# EAGLE board ble112_shield (EAGLE 7.2.0)
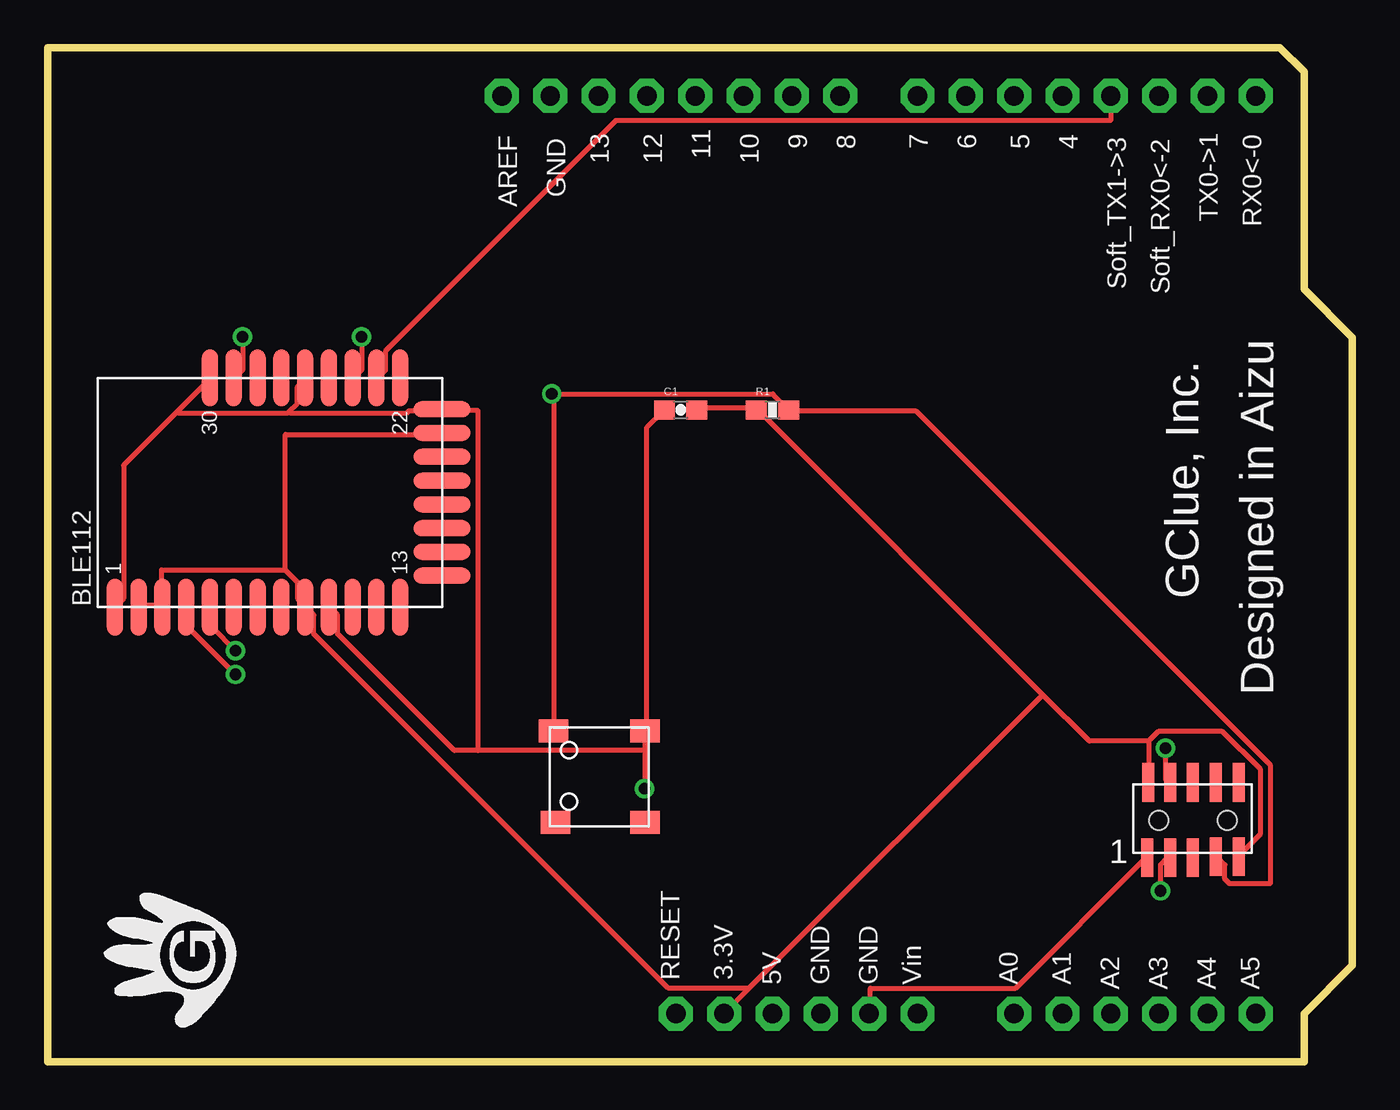
[diagram p0: board, top side]
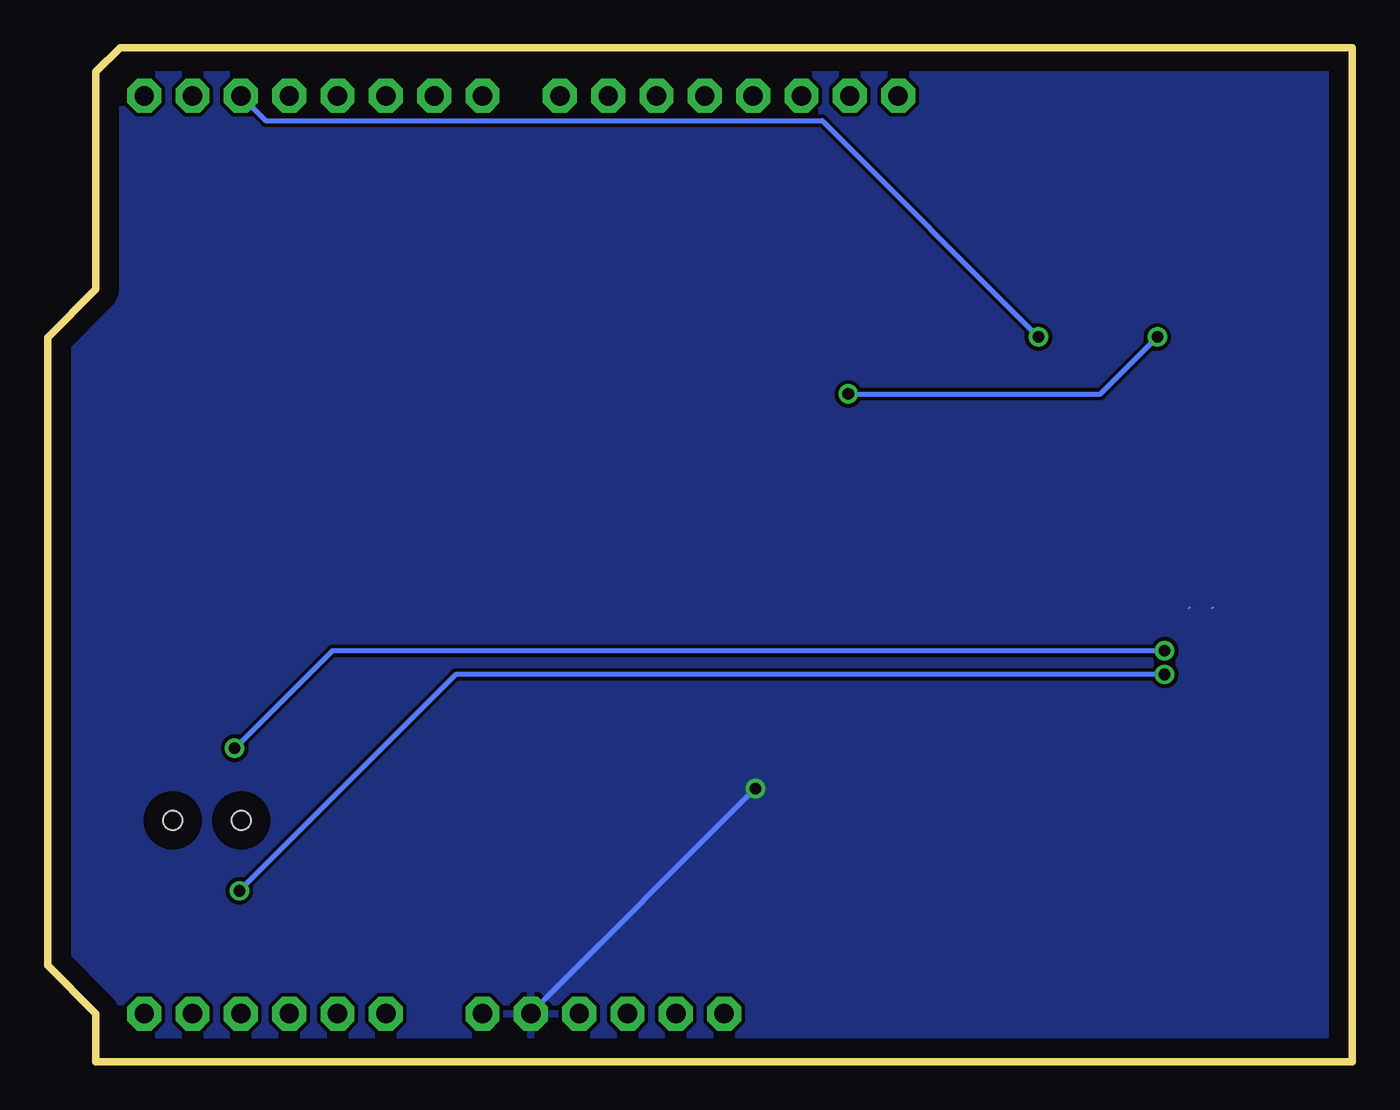
[diagram p1: board, bottom side, seen from below]

Size 68.58 x 53.34 mm. Coordinates in mm from the lower left corner, seen from the top.
Outline: 0,0 66.04,0 66.04,2.54 68.58,5.08 68.58,38.1 66.04,40.64 66.04,52.07 64.77,53.34 0,53.34 0,0
Copper layers (1*16): Top 0.035mm / dielectric 1.5mm / Bottom 0.035mm
Design rules "default": minimum track width 10mil, minimum drill 24mil, track to track 8mil, track to pad 8mil, pad to pad 8mil, via to via 8mil, smd to smd 8mil, copper to edge 40mil, drill to drill 8mil, minimum pad ring 10mil, minimum via ring 8mil, stop-mask expansion 4mil, vias tented up to drill 0mil, thermal gap 10mil

## Footprints (pad centres in the part's own frame; a part is rotated, then mirrored left to right if it is on the bottom)
1X06-CLEANBIG = drill 1.016 pad 1.778 octagon: 1 -6.35,0; 2 -3.81,0; 3 -1.27,0; 4 1.27,0; 5 3.81,0; 6 6.35,0
1X08-CLEANBIG = drill 1.016 pad 1.778 octagon: 1 -8.89,0; 2 -6.35,0; 3 -3.81,0; 4 -1.27,0; 5 1.27,0; 6 3.81,0; 7 6.35,0; 8 8.89,0
SF-BLUEGIGA_BLE112-A = smd 3 x 0.85: AVDD1 -6.05,6.9; AVDD2 -6.05,5.65; GND1 -6.05,8.15; GND2 -6.05,-3.1; GND4 6,3.15; P0_0 6,0.65; P0_1 6,-0.6; P0_2 6,-1.85; P0_3 6,-3.1; P0_4 6,-4.35; P0_5 6,-5.6; P0_6 6,-6.85; P1_5 -6.05,-6.85; P1_6 -6.05,-0.6; P1_7 -6.05,0.65; P2_0 -6.05,1.9; P2_1 -6.05,3.15; P2_2 -6.05,4.4; RESET 6,1.9; USB+ -6.05,-4.35; USB- -6.05,-5.6; VDD_USB -6.05,-1.85 | smd 0.85 x 3: DVDD 3.1,-9.05; GND3 4.35,-9.05; P0_7 1.85,-9.05; P1_0 0.6,-9.05; P1_1 -0.65,-9.05; P1_2 -1.9,-9.05; P1_3 -3.15,-9.05; P1_4 -4.4,-9.05
0603-CAP = smd 1.1 x 1: 1 -0.85,0; 2 0.85,0
0603-RES = smd 1.1 x 1: 1 -0.85,0; 2 0.85,0
PIN-HEADER-SMT(1.27MM)2X5 = smd 0.635 x 2.032: 1 -2.4,-1.95; 2 -2.35,2; 3 -1.2,-1.95; 4 -1.2,2; 5 0,-1.95; 6 0,2; 7 1.2,-1.9; 8 1.2,2; 9 2.4,-1.9; 10 2.4,2 | hole 1: 1.8,0; -1.8,0
SWICTH-LS6J2M-T = smd 1.55 x 1.2: 1 -2.4,2.4; 2 -2.3,-2.4; 3 2.4,2.4; 4 2.4,-2.4

## Placement (x,y rotation side)
1  [1X06-CLEANBIG]  57.15,2.54 0 top
2  [1X06-CLEANBIG]  39.37,2.54 0 top
3  [1X08-CLEANBIG]  54.61,50.8 180 top
4  [1X08-CLEANBIG]  32.77,50.8 180 top
BLE112  [SF-BLUEGIGA_BLE112-A]  11.68,29.97 90 top
C1  0.1μ  [0603-CAP]  33.27,34.29 0 top
R1  4.7K  [0603-RES]  38.1,34.29 0 top
U$1  PIN-HEADER-SMT(1.27MM)2X5  [PIN-HEADER-SMT(1.27MM)2X5]  60.2,12.7 0 top
U$4  SWITCH-LS6J2M-T  [SWICTH-LS6J2M-T]  29,15 0 top

## Library data of the parts
1-4 = adafruit
BLE112 = ble112
C1 R1 = SparkFun
U$1 U$4 = gclue

## Nets
3.3V: 2.2 BLE112.AVDD1 BLE112.AVDD2 BLE112.DVDD BLE112.VDD_USB C1.2 R1.1 U$1.2 U$1.9
D2: 3.3 BLE112.P0_4
D3: 3.4 BLE112.P0_5
DC: BLE112.P2_2 U$1.3
DD: BLE112.P2_1 U$1.4
GND: 2.5 BLE112.GND1 BLE112.GND2 BLE112.GND3 BLE112.GND4 BLE112.P0_2 C1.1 U$1.1 U$4.3
P0_0: BLE112.P0_0
P0_1: BLE112.P0_1
P0_3: BLE112.P0_3
P0_6: BLE112.P0_6
P0_7: BLE112.P0_7
P1_0: BLE112.P1_0
P1_1: BLE112.P1_1
P1_2: BLE112.P1_2
P1_3: BLE112.P1_3
P1_4: BLE112.P1_4
P1_5: BLE112.P1_5
P1_6: BLE112.P1_6
P1_7: BLE112.P1_7
P2_0: BLE112.P2_0
RESET: BLE112.RESET R1.2 U$1.7 U$4.1
USB+: BLE112.USB+
USB-: BLE112.USB-

## Tracks (layer width: path | path; a pad name or v marks a point on that pad's centre or on a via)
3.3V
  Top 0.254: BLE112.AVDD1 4.88,24 6,24 BLE112.AVDD2 6,24.12 6,25.88 12.5,25.88 | 12.5,25.88 13.12,25.25 13.12,24.38 13.5,24 BLE112.VDD_USB 13.62,23.88 14,23.5 14,22.5 32.62,3.88 36.75,3.88 36.81,3.81 | 12.5,25.88 12.5,33 20.62,33 BLE112.DVDD | C1.2 34.12,34.38 37.25,34.38 R1.1 37.38,34.25 52.31,19.31 | 57.88,16.88 57.88,14.75 U$1.2 | 57.88,16.88 58.38,17.38 61.75,17.38 63.75,15.38 63.75,12 62.62,10.88 U$1.9 | 52.31,19.31 54.75,16.88 57.88,16.88 | 52.31,19.31 36.81,3.81 | 36.81,3.81 35.62,2.62 2.2
D2  (via drill 0.61)
  Top 0.254: v16.5,38.12 16.5,36.38 16.12,36 BLE112.P0_4
  Bottom 0.254: v16.5,38.12 27.88,49.5 57.12,49.5 58.38,50.75 3.3
D3
  Top 0.254: BLE112.P0_5 17.38,36 17.75,36.38 17.75,37.38 29.88,49.5 55.88,49.5 55.88,50.75 3.4
DC  (via drill 0.61)  (1 unrouted)
  Top 0.254: v58.5,9 58.5,10.38 58.88,10.75 U$1.3 | v9.88,20.38 7.38,22.88 7.38,23.88
  Bottom 0.254: v58.5,9 47.12,20.38 v9.88,20.38
DD  (via drill 0.61)  (1 unrouted)
  Top 0.254: v58.75,16.5 58.75,14.88 58.88,14.75 U$1.4 | v9.88,21.62 8.62,22.88 8.62,23.88
  Bottom 0.254: v58.75,16.5 53.62,21.62 v9.88,21.62
GND  (via drill 0.61)
  Top 0.254: 6.81,34.19 8.5,35.88 BLE112.GND4 | 6.81,34.19 4,31.38 4,24.38 3.62,24 BLE112.GND1 | 12.69,34.19 12.62,34.12 6.88,34.12 6.81,34.19 | 12.69,34.19 13.12,34.62 13.12,35.5 13.5,35.88 BLE112.P0_2 | 12.69,34.19 12.75,34.12 18.88,34.12 19,34.25 20.62,34.25 BLE112.GND3 20.75,34.25 22.62,34.25 22.62,16.38 | U$1.1 57.75,10.75 50.88,3.88 43.25,3.88 43.25,2.62 2.5 | C1.1 32.38,34.25 31.5,33.38 31.5,17.5 U$4.3 31.38,17.38 31.38,16.38 | 31.38,16.38 22.62,16.38 | 22.62,16.38 21.38,16.38 15.25,22.5 15.25,23.5 14.88,23.88 BLE112.GND2 | 31.38,16.38 v31.38,14.38
  Bottom 0.254: v31.38,14.38 43.12,2.62 2.5
  pour Bottom: -1,55 70,55 70,-1 -1,-1
RESET  (via drill 0.61)
  Top 0.254: 26.62,35.12 38.12,35.12 38.88,34.38 R1.2 39,34.25 45.62,34.25 64.25,15.62 64.25,9.38 62.12,9.38 61.88,9.62 61.88,10.38 61.5,10.75 U$1.7 | 26.62,35.12 26.62,17.5 U$4.1 | v10.25,38.12 10.25,36.38 9.88,36 BLE112.RESET | v26.5,35.12 26.62,35.12
  Bottom 0.254: v10.25,38.12 13.25,35.12 v26.5,35.12

## Text on the board
tPlace: 9 | 8 | 7 | 6 | 5 | 4 | 13 | 12 | 11 | 10 | AREF | GND | TX0->1 | RX0<-0 | Soft_TX1->3 | Soft_RX0<-2 | GClue, Inc. | Designed in Aizu | RESET | 3.3V | 5V | GND | GND | Vin | A0 | A1 | A2 | A3 | A4 | A5